# EAGLE board main (EAGLE 8.1.0)
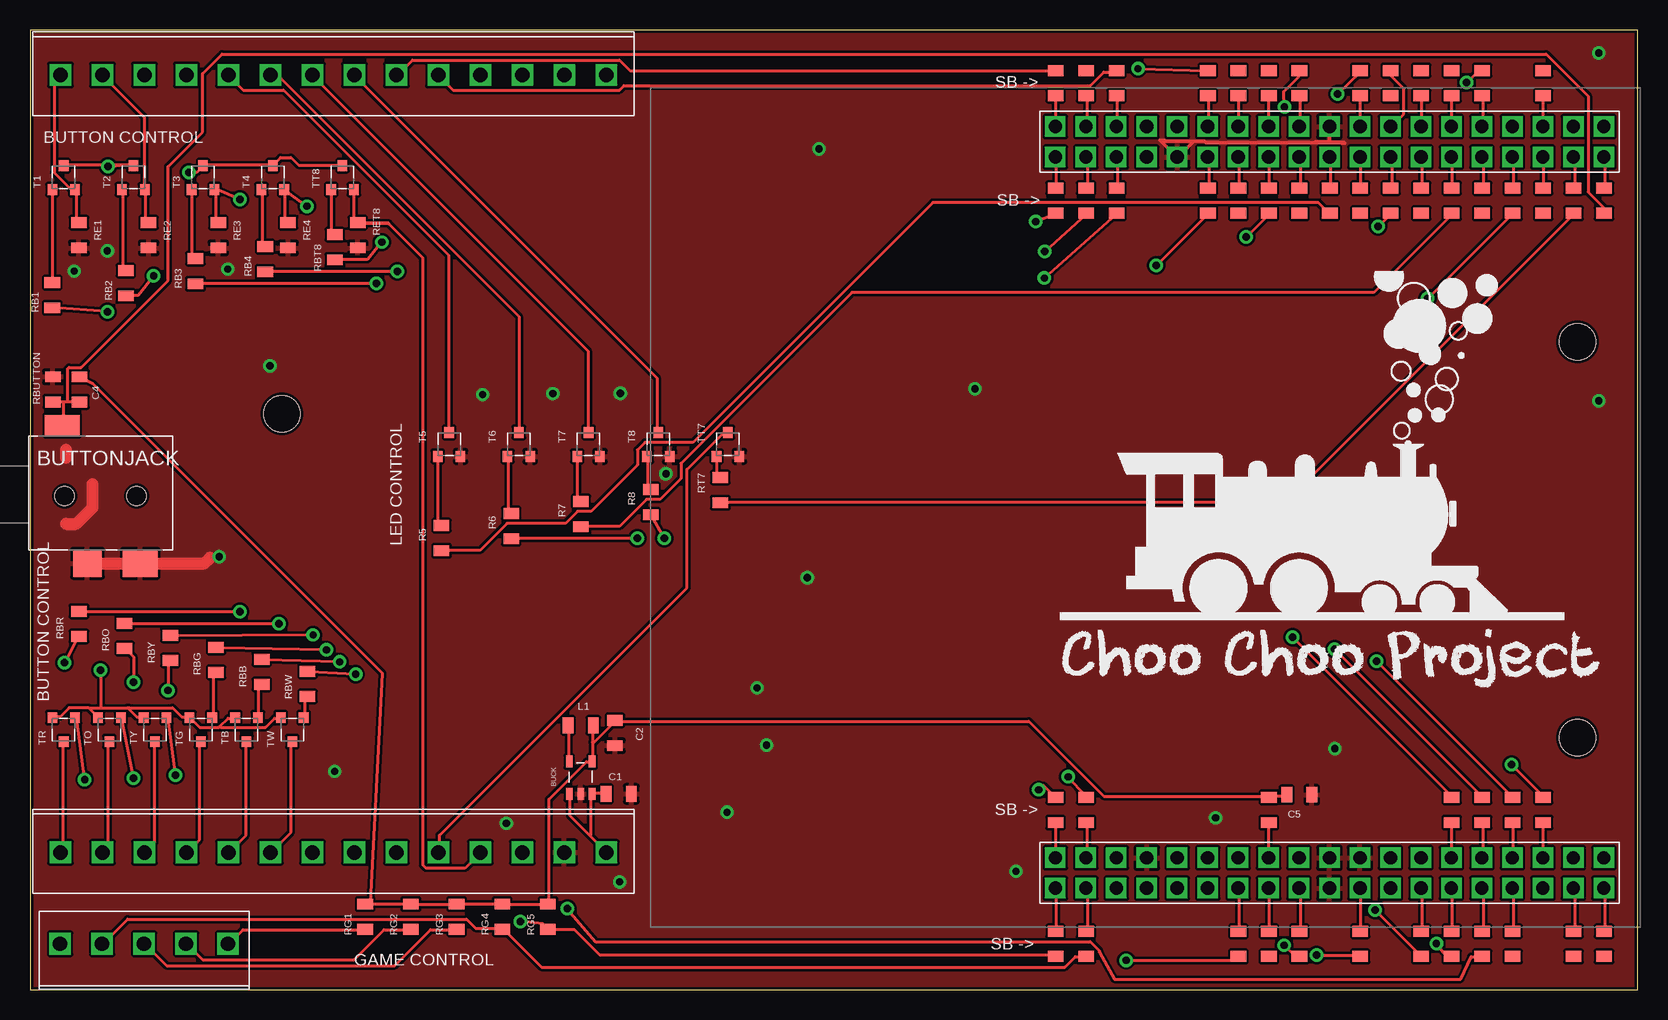
[diagram p0: board, top side]
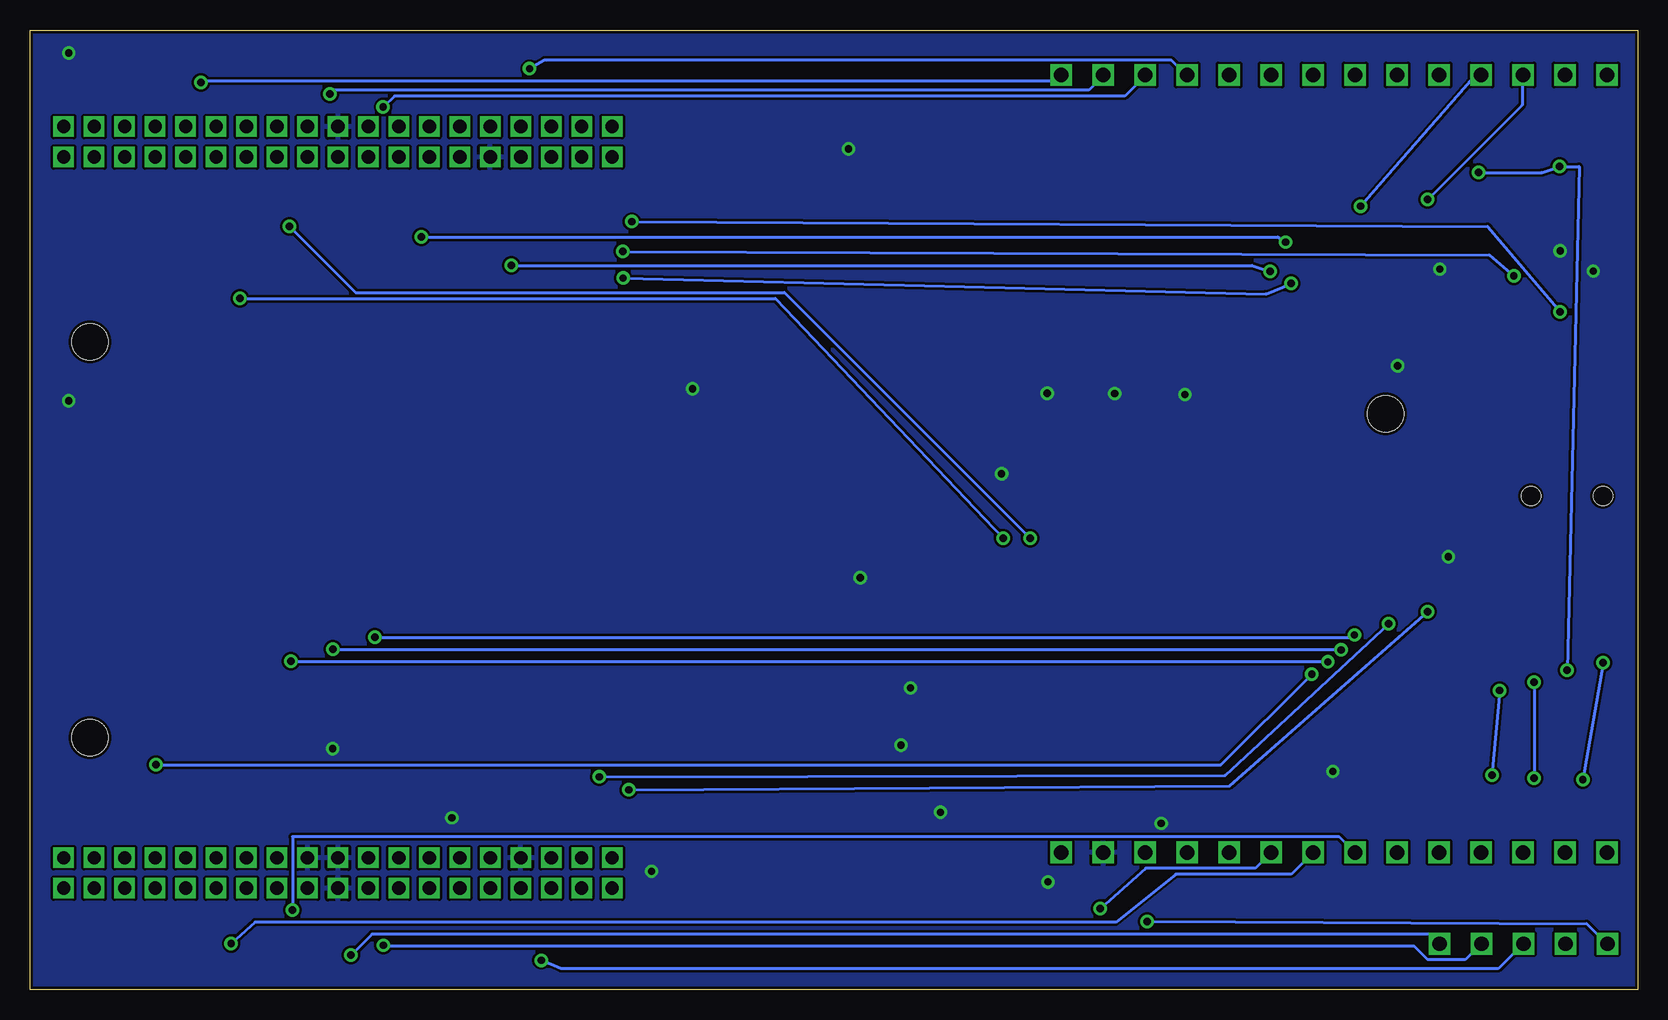
[diagram p1: board, bottom side, seen from below]

Size 134 x 80 mm. Coordinates in mm from the lower left corner, seen from the top.
Outline: 0,0 134,0 134,80 0,80 0,0
Copper layers (1*16): Top 0.035mm / dielectric 1.5mm / Bottom 0.035mm
Design rules "SparkFun *": minimum track width 8mil, minimum drill 0.3mm, track to track 8mil, track to pad 8mil, pad to pad 8mil, via to via 8mil, smd to smd 8mil, copper to edge 10mil, drill to drill 8mil, minimum pad ring 12mil, minimum via ring 10mil, stop-mask expansion 4mil, vias tented up to drill 25mil, thermal gap 10mil
Holes 3 mm at 21,48 129,54 129,21

## Footprints (pad centres in the part's own frame; a part is rotated, then mirrored left to right if it is on the bottom)
BUCK_DEV = smd 0.55 x 1: EN 1.9,0; FB 1.9,2.7; GND 0.95,0; SW 0,2.7; VIN 0,0
3.5MM_MONO_DEV = smd 2.9 x 1.75: P1 -6.2,5.875 | smd 2.9 x 2.25: P2 0.3,-5.625 | smd 2.4 x 2.25: P3 -4.1,-5.625 | hole 1.6: 0,0; -6,0
0805RES_DEV = smd 0.9 x 1.3: L -1.05,0; R 1.05,0
NUCLEO_SMALL_DEV = drill 1.1 square: P$1 0,45.72; P$2 0,43.18; P$3 0,40.64; P$4 0,38.1; P$5 0,35.56; P$6 0,33.02; P$7 0,30.48; P$8 0,27.94; P$9 0,25.4; P$10 0,22.86; P$11 0,20.32; P$12 0,17.78; P$13 0,15.24; P$14 0,12.7; P$15 0,10.16; P$16 0,7.62; P$17 0,5.08; P$18 0,2.54; P$19 0,0; P$20 2.54,45.72; P$21 2.54,43.18; P$22 2.54,40.64; P$23 2.54,38.1; P$24 2.54,35.56; P$25 2.54,33.02; P$26 2.54,30.48; P$27 2.54,27.94; P$28 2.54,25.4; P$29 2.54,22.86; P$30 2.54,20.32; P$31 2.54,17.78; P$32 2.54,15.24; P$33 2.54,12.7; P$34 2.54,10.16; P$35 2.54,7.62; P$36 2.54,5.08; P$37 2.54,2.54; P$38 2.54,0; P$39 60.96,45.72; P$40 60.96,43.18; P$41 60.96,40.64; P$42 60.96,38.1; P$43 60.96,35.56; P$44 60.96,33.02; P$45 60.96,30.48; P$46 60.96,27.94; P$47 60.96,25.4; P$48 60.96,22.86; P$49 60.96,20.32; P$50 60.96,17.78; P$51 60.96,15.24; P$52 60.96,12.7; P$53 60.96,10.16; P$54 60.96,7.62; P$55 60.96,5.08; P$56 60.96,2.54; P$57 60.96,0; P$58 63.5,45.72; P$59 63.5,43.18; P$60 63.5,40.64; P$61 63.5,38.1; P$62 63.5,35.56; P$63 63.5,33.02; P$64 63.5,30.48; P$65 63.5,27.94; P$66 63.5,25.4; P$67 63.5,22.86; P$68 63.5,20.32; P$69 63.5,17.78; P$70 63.5,15.24; P$71 63.5,12.7; P$72 63.5,10.16; P$73 63.5,7.62; P$74 63.5,5.08; P$75 63.5,2.54; P$76 63.5,0
MMBT2222A_DEV = smd 0.9 x 0.8: B -1,0.95; C 1,0; E -1,-0.95
5WIRE_DEV = drill 1.2 square: P$1 0,0; P$2 3.5,0; P$3 7,0; P$4 10.5,0; P$5 14,0
14WIRE_TERM_DEV = drill 1.2 square: P$1 0,0; P$2 3.5,0; P$3 7,0; P$4 10.5,0; P$5 14,0; P$6 17.5,0; P$7 21,0; P$8 24.5,0; P$9 28,0; P$10 31.5,0; P$11 35,0; P$12 38.5,0; P$13 42,0; P$14 45.5,0

## Placement (x,y rotation side)
BUCK  BUCK_DEV  [BUCK_DEV]  44.95,16.31 0 top
BUTTONJACK  3.5MM_MONO_DEV  [3.5MM_MONO_DEV]  8.89,41.15 0 top
C1  4.7uF  [0805RES_DEV]  49.08,16.31 180 top
C2  10uF  [0805RES_DEV]  48.76,21.39 90 top
C4  100nF  [0805RES_DEV]  1.91,50.04 270 top
C5  100nF  [0805RES_DEV]  105.81,16.24 180 top
L1  2.2uH  [0805RES_DEV]  45.9,22.02 0 top
NUCLEO-L476RG  NUCLEO_SMALL_DEV  [NUCLEO_SMALL_DEV]  131.19,8.45 90 top
R5  10k  [0805RES_DEV]  34.3,37.64 90 top
R6  10k  [0805RES_DEV]  40.12,38.64 90 top
R7  10k  [0805RES_DEV]  45.92,39.64 90 top
R8  10k  [0805RES_DEV]  51.73,40.64 90 top
RB1  10k  [0805RES_DEV]  1.86,57.88 270 top
RB2  10k  [0805RES_DEV]  7.99,58.88 270 top
RB3  10k  [0805RES_DEV]  13.79,59.88 270 top
RB4  10k  [0805RES_DEV]  19.61,60.88 270 top
RBB  10k  [0805RES_DEV]  19.32,26.48 90 top
RBG  19k  [0805RES_DEV]  15.51,27.48 90 top
RBO  10k  [0805RES_DEV]  7.89,29.48 90 top
RBR  10k  [0805RES_DEV]  4.08,30.48 90 top
RBT8  10k  [0805RES_DEV]  25.41,61.88 270 top
RBUTTON  10k  [0805RES_DEV]  4.13,50.04 90 top
RBW  10k  [0805RES_DEV]  23.13,25.48 90 top
RBY  10k  [0805RES_DEV]  11.7,28.48 90 top
RE1  4.7k  [0805RES_DEV]  4.08,62.88 270 top
RE2  4.7k  [0805RES_DEV]  9.89,62.88 270 top
RE3  4.7k  [0805RES_DEV]  15.7,62.88 270 top
RE4  4.7k  [0805RES_DEV]  21.51,62.88 270 top
RET8  4.7k  [0805RES_DEV]  27.32,62.88 270 top
RG1  10k  [0805RES_DEV]  27.94,6.08 270 top
RG2  10k  [0805RES_DEV]  31.75,6.08 270 top
RG3  10k  [0805RES_DEV]  35.56,6.08 270 top
RG4  10k  [0805RES_DEV]  39.37,6.08 270 top
RG5  10k  [0805RES_DEV]  43.18,6.08 270 top
RT7  10k  [0805RES_DEV]  57.55,41.64 90 top
SB1  0  [0805RES_DEV]  85.49,3.81 90 top
SB2  0  [0805RES_DEV]  88.03,3.81 90 top
SB3  0  [0805RES_DEV]  100.73,3.81 90 top
SB4  0  [0805RES_DEV]  103.27,3.81 90 top
SB5  0  [0805RES_DEV]  105.81,3.81 90 top
SB6  0  [0805RES_DEV]  110.89,3.81 90 top
SB7  0  [0805RES_DEV]  115.97,3.81 90 top
SB8  0  [0805RES_DEV]  118.51,3.81 90 top
SB9  0  [0805RES_DEV]  121.05,3.81 90 top
SB10  0  [0805RES_DEV]  123.59,3.81 90 top
SB11  0  [0805RES_DEV]  128.67,3.81 90 top
SB12  0  [0805RES_DEV]  131.21,3.81 90 top
SB13  0  [0805RES_DEV]  85.49,14.97 90 top
SB14  0  [0805RES_DEV]  88.03,14.97 90 top
SB15  0  [0805RES_DEV]  118.51,14.97 90 top
SB16  0  [0805RES_DEV]  121.05,14.97 90 top
SB17  0  [0805RES_DEV]  123.59,14.97 90 top
SB18  0  [0805RES_DEV]  126.13,14.97 90 top
SB19  0  [0805RES_DEV]  85.49,65.77 90 top
SB20  0  [0805RES_DEV]  88.03,65.77 90 top
SB21  0  [0805RES_DEV]  90.57,65.77 90 top
SB22  0  [0805RES_DEV]  98.19,65.77 90 top
SB23  0  [0805RES_DEV]  100.73,65.77 90 top
SB24  0  [0805RES_DEV]  103.27,65.77 90 top
SB25  0  [0805RES_DEV]  105.81,65.77 90 top
SB26  0  [0805RES_DEV]  108.35,65.77 90 top
SB27  0  [0805RES_DEV]  110.89,65.77 90 top
SB28  0  [0805RES_DEV]  113.43,65.77 90 top
SB29  0  [0805RES_DEV]  115.97,65.77 90 top
SB30  0  [0805RES_DEV]  118.51,65.77 90 top
SB31  0  [0805RES_DEV]  121.05,65.77 90 top
SB32  0  [0805RES_DEV]  123.59,65.77 90 top
SB33  0  [0805RES_DEV]  126.13,65.77 90 top
SB34  0  [0805RES_DEV]  128.67,65.77 90 top
SB35  0  [0805RES_DEV]  131.21,65.77 90 top
SB36  0  [0805RES_DEV]  85.49,75.56 90 top
SB37  0  [0805RES_DEV]  88.03,75.56 90 top
SB38  0  [0805RES_DEV]  90.57,75.56 90 top
SB39  0  [0805RES_DEV]  98.19,75.56 90 top
SB40  0  [0805RES_DEV]  100.73,75.56 90 top
SB41  0  [0805RES_DEV]  103.27,75.56 90 top
SB42  0  [0805RES_DEV]  105.81,75.56 90 top
SB43  0  [0805RES_DEV]  110.89,75.56 90 top
SB44  0  [0805RES_DEV]  113.43,75.56 270 top
SB45  0  [0805RES_DEV]  115.97,75.56 90 top
SB46  0  [0805RES_DEV]  118.51,75.56 90 top
SB47  0  [0805RES_DEV]  121.05,75.56 90 top
SB48  0  [0805RES_DEV]  126.13,75.56 90 top
SBPWR  0  [0805RES_DEV]  103.27,14.97 90 top
T1  MMBT2222L_DEV  [MMBT2222A_DEV]  2.81,67.69 90 top
T2  MMBT2222L_DEV  [MMBT2222A_DEV]  8.62,67.69 90 top
T3  MMBT2222L_DEV  [MMBT2222A_DEV]  14.43,67.69 90 top
T4  MMBT2222L_DEV  [MMBT2222A_DEV]  20.24,67.69 90 top
T5  MMBT2222L_DEV  [MMBT2222A_DEV]  34.94,45.45 90 top
T6  MMBT2222L_DEV  [MMBT2222A_DEV]  40.75,45.45 90 top
T7  MMBT2222L_DEV  [MMBT2222A_DEV]  46.56,45.45 90 top
T8  MMBT2222L_DEV  [MMBT2222A_DEV]  52.37,45.45 90 top
TB  MMBT2222L_DEV  [MMBT2222A_DEV]  18.05,21.67 270 top
TG  MMBT2222L_DEV  [MMBT2222A_DEV]  14.24,21.67 270 top
TO  MMBT2222L_DEV  [MMBT2222A_DEV]  6.62,21.67 270 top
TR  MMBT2222L_DEV  [MMBT2222A_DEV]  2.81,21.67 270 top
TT7  MMBT2222L_DEV  [MMBT2222A_DEV]  58.18,45.45 90 top
TT8  MMBT2222L_DEV  [MMBT2222A_DEV]  26.05,67.69 90 top
TW  MMBT2222L_DEV  [MMBT2222A_DEV]  21.86,21.67 270 top
TY  MMBT2222L_DEV  [MMBT2222A_DEV]  10.43,21.67 270 top
U$2  5WIRE_TERM_DEV  [5WIRE_DEV]  16.51,3.81 180 top
U$3  14WIRE_TERM_DEV  [14WIRE_TERM_DEV]  2.54,76.25 0 top
U$4  14WIRE_TERM_DEV  [14WIRE_TERM_DEV]  2.54,11.43 0 top

## Library data of the parts
BUCK BUTTONJACK C1 C2 C4 C5 L1 NUCLEO-L476RG R5-R8 RB1-RB4 RBB RBG RBO RBR RBT8 RBUTTON RBW RBY RE1-RE4 RET8 RG1-RG5 RT7 SB1-SB48 SBPWR T1-T8 TB TG TO TR TT7 TT8 TW TY U$2-U$4 = apple

## Nets
+3.3V: BUCK.FB C2.R C5.R L1.R RBUTTON.R RG1.L RG2.L RG3.L RG4.L RG5.L SBPWR.R
B2R1: RB1.L T1.B
B2R2: RB2.L T2.B
B2R3: RB3.L T3.B
B2R5: R5.R T5.B
B2R6: R6.R T6.B
B2R7: R7.R T7.B
B2R8: R8.R T8.B
B2RT7: RT7.R TT7.B
B2RT8: RBT8.L TT8.B
BTR3: RB4.L T4.B
C2N: T1.C T2.C T3.C T4.C TB.E TG.E TO.E TR.E TT8.C TW.E TY.E
GND: BUCK.GND BUTTONJACK.P2 BUTTONJACK.P3 C1.L C2.L C4.L C5.L NUCLEO-L476RG.P$10 NUCLEO-L476RG.P$23 NUCLEO-L476RG.P$29 NUCLEO-L476RG.P$30 NUCLEO-L476RG.P$43 NUCLEO-L476RG.P$67 RE1.R RE2.R RE3.R RE4.R RET8.R T5.E T6.E T7.E T8.E TT7.E U$4.P$13
GPIO1: RB1.R SB19.L
GPIO2: RB2.R SB20.L
GPIO3: RB3.R SB21.L
GPIO4: RB4.R SB22.L
GPIO5: R5.L SB26.L
GPIO6: R6.L SB28.L
GPIO7: R7.L SB30.L
GPIO8: R8.L SB32.L
GPIO9: SB36.R U$3.P$9
GPIO10: SB38.R U$3.P$10
GPIO11: SB39.R U$3.P$11
GPIO12: SB42.R U$3.P$12
GPIO13: SB43.R U$3.P$13
GPIO14: SB47.R U$3.P$14
GPIOB: RBB.R SB17.R
GPIOBUTTON: BUTTONJACK.P1 C4.R RBUTTON.L SB35.L
GPIOG: RBG.R SB16.R
GPIOG1: RG1.R SB6.L U$2.P$1
GPIOG2: RG2.R SB5.L U$2.P$2
GPIOG3: RG3.R SB3.L U$2.P$3
GPIOG4: RG4.R SB2.L U$2.P$4
GPIOG5: RG5.R SB1.L U$2.P$5
GPIOO: RBO.R SB14.R
GPIOR: RBR.R SB13.R
GPIOT1: SB7.L U$4.P$7
GPIOT2: SB8.L U$4.P$8
GPIOT3: SB9.L U$4.P$9
GPIOT7: RT7.L SB34.L
GPIOT8: RBT8.R SB24.L
GPIOW: RBW.R SB18.R
GPIOY: RBY.R SB15.R
N$6: RBR.L TR.B
N$8: NUCLEO-L476RG.P$1 SB1.R
N$9: RBO.L TO.B
N$10: NUCLEO-L476RG.P$2 SB2.R
N$11: RBY.L TY.B
N$13: RBG.L TG.B
N$15: RBB.L TB.B
N$17: RBW.L TW.B
N$18: NUCLEO-L476RG.P$7 SB3.R
N$20: NUCLEO-L476RG.P$8 SB4.R
N$22: NUCLEO-L476RG.P$9 SB5.R
N$23: NUCLEO-L476RG.P$13 SB7.R
N$24: NUCLEO-L476RG.P$14 SB8.R
N$25: NUCLEO-L476RG.P$15 SB9.R
N$26: NUCLEO-L476RG.P$16 SB10.R
N$27: NUCLEO-L476RG.P$18 SB11.R
N$28: NUCLEO-L476RG.P$19 SB12.R
N$29: NUCLEO-L476RG.P$36 SB18.L
N$30: NUCLEO-L476RG.P$35 SB17.L
N$31: NUCLEO-L476RG.P$34 SB16.L
N$32: NUCLEO-L476RG.P$33 SB15.L
N$33: NUCLEO-L476RG.P$21 SB14.L
N$34: NUCLEO-L476RG.P$20 SB13.L
N$35: NUCLEO-L476RG.P$39 SB19.R
N$36: NUCLEO-L476RG.P$40 SB20.R
N$37: NUCLEO-L476RG.P$41 SB21.R
N$38: NUCLEO-L476RG.P$44 SB22.R
N$39: NUCLEO-L476RG.P$45 SB23.R
N$40: NUCLEO-L476RG.P$46 SB24.R
N$41: NUCLEO-L476RG.P$47 SB25.R
N$42: NUCLEO-L476RG.P$48 SB26.R
N$43: NUCLEO-L476RG.P$49 SB27.R
N$44: NUCLEO-L476RG.P$11 SB6.R
N$45: NUCLEO-L476RG.P$50 SB28.R
N$46: NUCLEO-L476RG.P$51 SB29.R
N$47: NUCLEO-L476RG.P$52 SB30.R
N$48: NUCLEO-L476RG.P$53 SB31.R
N$49: NUCLEO-L476RG.P$54 SB32.R
N$50: NUCLEO-L476RG.P$55 SB33.R
N$51: NUCLEO-L476RG.P$56 SB34.R
N$52: NUCLEO-L476RG.P$57 SB35.R
N$53: NUCLEO-L476RG.P$58 SB36.L
N$54: NUCLEO-L476RG.P$59 SB37.L
N$55: NUCLEO-L476RG.P$60 SB38.L
N$56: NUCLEO-L476RG.P$68 SB43.L
N$57: NUCLEO-L476RG.P$69 SB44.L
N$58: NUCLEO-L476RG.P$63 SB39.L
N$59: NUCLEO-L476RG.P$64 SB40.L
N$60: NUCLEO-L476RG.P$65 SB41.L
N$61: NUCLEO-L476RG.P$66 SB42.L
N$62: NUCLEO-L476RG.P$70 SB45.L
N$63: NUCLEO-L476RG.P$71 SB46.L
N$64: NUCLEO-L476RG.P$72 SB47.L
N$65: NUCLEO-L476RG.P$74 SB48.L
N$66: NUCLEO-L476RG.P$27 SBPWR.L
P1: RE1.L T1.E U$3.P$1
P2: RE2.L T2.E U$3.P$2
P3: RE3.L T3.E U$3.P$3
P4: RE4.L T4.E U$3.P$4
P5: T5.C U$3.P$5
P6: T6.C U$3.P$6
P7: T7.C U$3.P$7
P8: T8.C U$3.P$8
PB: TB.C U$4.P$5
PG: TG.C U$4.P$4
PGAME: U$4.P$12
PO: TO.C U$4.P$2
PR: TR.C U$4.P$1
PT7: TT7.C U$4.P$10
PT8: RET8.L TT8.E U$4.P$11
PW: TW.C U$4.P$6
PY: TY.C U$4.P$3
SW2L1: BUCK.SW L1.L
VCC: BUCK.EN BUCK.VIN C1.R U$4.P$14

## Tracks (layer width: path | path; a pad name or v marks a point on that pad's centre or on a via)
+3.3V
  Top 0.254: C5.R 104.75,16.12 103.38,16.12 SBPWR.R 103.25,16.12 89.5,16.12 83.25,22.38 48.88,22.38 C2.R 48.75,22.38 47,20.62 46.88,20.62 | 46.88,20.62 46.88,22 L1.R | 46.88,20.62 46.88,19.12 BUCK.FB 46.75,19 46.38,19 43.25,15.88 43.25,7.25 RG5.L 43.12,7.12 RG4.L 39.25,7.12 35.62,7.12 RG3.L 35.5,7.12 31.88,7.12 RG2.L 28,7.12 RG1.L 28.38,7.25 29.38,26.38 5.25,50.5 4.25,51 RBUTTON.R
B2R1
  Top 0.254: T1.B 1.88,66.62 1.88,59 RB1.L
B2R2
  Top 0.254: T2.B 7.75,66.62 7.75,60.12 7.88,60 RB2.L
B2R3
  Top 0.254: T3.B 13.5,66.62 13.5,61.25 13.75,61 RB3.L
B2R5
  Top 0.254: T5.B 34,44.38 34,39 34.25,38.75 R5.R
B2R6
  Top 0.254: T6.B 39.88,44.38 39.88,39.88 40,39.75 R6.R
B2R7
  Top 0.254: T7.B 45.62,44.38 45.62,41 45.88,40.75 R7.R
B2R8
  Top 0.254: T8.B 51.5,44.38 51.5,41.88 51.62,41.75 R8.R
B2RT7
  Top 0.254: TT7.B 57.25,44.38 57.25,43 57.5,42.75 RT7.R
B2RT8
  Top 0.254: TT8.B 25.12,66.62 25.12,63.25 25.38,63 RBT8.L
BTR3
  Top 0.254: T4.B 19.38,66.62 19.38,62.12 19.5,62 RB4.L
C2N  (via drill 0.61)
  Top 0.254: 4.88,23.5 3.25,23.5 2.5,22.75 1.88,22.75 TR.E | 4.88,23.5 5.62,22.75 TO.E | 8.19,23.44 8.12,23.5 5.88,23.5 | 8.19,23.44 8.88,22.75 9.38,22.75 TY.E | 4.88,23.5 5.88,23.5 | 8.19,23.44 8.25,23.5 11.88,23.5 12.62,22.75 13.25,22.75 TG.E 13.38,22.62 14.12,21.88 15.75,21.88 15.81,21.94 | 15.81,21.94 16.5,22.62 17,22.62 TB.E | TW.E 20.88,22.62 20.38,22.62 19.62,21.88 15.88,21.88 15.81,21.94 | 7.5,68.75 8.5,68.75 T2.C | 7.5,68.75 2.88,68.75 T1.C | TT8.C 26,68.75 22.38,68.75 21.75,69.38 20.88,69.38 20.25,68.75 T4.C 20.12,68.75 14.5,68.75 T3.C 14.38,68.62 13.88,68.12 v13.25,68.12 | v6.5,68.62 7.5,68.75 | v5.88,26.62 5.88,23.5
  Bottom 0.254: v13.25,68.12 8,68.12 v6.5,68.62 4.88,68.62 v5.88,26.62
GND  (via drill 0.6)
  Top 0.305: NUCLEO-L476RG.P$67 108.33,70.82 108.21,70.7 107.16,70.7 107.1,70.64 109.53,70.64 109.59,70.58 109.37,70.58 109.33,70.62 98,70.62 97.88,70.74 97,70.74 | 97,70.74 95.67,69.41 NUCLEO-L476RG.P$43 95.59,69.41 94.18,70.82 94.54,70.82 94.63,70.74 97,70.74
  Top 1.016: BUTTONJACK.P3 14.53,35.52 15,36 | 3,38.83 3.85,38.83 5.21,40.19 5.21,42.11 | 3,44.33 3,45
  other vias: 20,52 3.69,59.89 6.45,61.58 16.48,60.06 37.73,49.6 43.58,49.68 49.21,49.7 53.01,43 39.71,13.86 49.14,8.97 58.11,14.78 61.39,20.38 60.61,25.14 64.79,34.33 98.84,14.31 82.19,9.85 108.77,20.08 130.77,78.08 65.77,70.08 78.77,50.08 130.77,49.08 15.77,36.08 25.39,18.18
  pour Top: 0,0 0,80.01 134.02,80.01 134.02,0
  pour Bottom: -3,-3 -3,84 135,84 135,-3
GPIO1  (via drill 0.61)
  Top 0.254: v6.45,56.51 1.88,56.88 RB1.R | v83.83,64.03 85.38,64.62 SB19.L
  Bottom 0.254: v6.45,56.51 12.5,63.62 v83.83,64.03
GPIO2  (via drill 0.61)
  Top 0.254: v10.31,59.5 9,57.88 8,57.88 RB2.R | v84.58,61.53 88,64.62 SB20.L
  Bottom 0.254: v10.31,59.5 12.38,61.25 v84.58,61.53
GPIO3  (via drill 0.61)
  Top 0.254: v28.88,58.88 13.88,58.88 RB3.R | v84.56,59.32 90.5,64.62 SB21.L
  Bottom 0.254: v28.88,58.88 31,58 v84.56,59.32
GPIO4  (via drill 0.61)
  Top 0.254: v30.62,59.88 19.62,59.88 RB4.R | v93.88,60.38 98.12,64.62 SB22.L
  Bottom 0.254: v30.62,59.88 32.12,60.38 v93.88,60.38
GPIO5
  Top 0.254: R5.L 34.38,36.62 37.5,36.62 39.75,38.88 44.62,38.88 45.62,39.88 46.75,39.88 50.62,43.75 50.62,45 51.25,45.62 55.25,45.62 75.25,65.62 107.38,65.62 108.25,64.75 SB26.L
GPIO6  (via drill 0.61)
  Top 0.254: v50.62,37.62 40.12,37.62 R6.L | v112.38,63.62 113.38,64.62 SB28.L
  Bottom 0.254: v50.62,37.62 71.12,58.12 106.88,58.12 v112.38,63.62
GPIO7
  Top 0.254: R7.L 46,38.62 49.12,38.62 51.38,40.88 52.5,40.88 54.25,42.62 54.25,43.88 68.5,58.12 112,58.12 118.5,64.62 SB30.L
GPIO8  (via drill 0.61)
  Top 0.254: v52.88,37.62 51.75,39.62 R8.L | v116.5,57.62 123.5,64.62 SB32.L
  Bottom 0.254: v52.88,37.62 71.88,57.62 v116.5,57.62
GPIO9
  Top 0.254: SB36.R 85.38,76.62 50,76.62 49.12,77.5 31.88,77.5 30.62,76.25 U$3.P$9
GPIO10
  Top 0.254: SB38.R 90.5,76.5 89.5,76.5 88.38,75.38 49.5,75.38 49.12,75 35.25,75 34.12,76.12 U$3.P$10
GPIO11  (via drill 0.61)
  Top 0.254: v92.36,76.78 98.12,76.62 SB39.R
  Bottom 0.254: v92.36,76.78 91.12,77.5 38.88,77.5 37.62,76.25 U$3.P$11
GPIO12  (via drill 0.61)
  Top 0.254: v104.57,73.58 104.5,74.88 105.75,76.12 105.75,76.5 SB42.R
  Bottom 0.254: v104.57,73.58 103.62,74.5 42.75,74.5 41.12,76.12 U$3.P$12
GPIO13  (via drill 0.61)
  Top 0.254: v109,74.67 110.88,76.5 SB43.R
  Bottom 0.254: v109,74.67 109.12,75 45.75,75 44.62,76.12 U$3.P$13
GPIO14  (via drill 0.61)
  Top 0.254: v119.75,75.62 120.62,76.5 121,76.5 SB47.R
  Bottom 0.254: v119.75,75.62 119.62,75.75 48.5,75.75 48.12,76.12 U$3.P$14
GPIOB  (via drill 0.61)
  Top 0.254: v25.81,27.32 19.38,27.5 RBB.R | v112.25,27.38 123.5,16.12 SB17.R
  Bottom 0.254: v25.81,27.32 26.12,27.38 v112.25,27.38
GPIOBUTTON
  Top 0.254: 3.12,49 RBUTTON.L | 3.12,49 2.75,49 | 2.75,49 2,49 C4.R | 3.12,49 3.12,51.75 3.25,51.88 4.25,51.88 11.5,59.12 11.5,68.62 14.38,71.5 14.38,76.38 16,78 126.38,78 129.88,74.5 129.88,66.5 131.12,65.25 131.12,64.75 SB35.L | 2.75,49 2.75,47.12 BUTTONJACK.P1
GPIOG  (via drill 0.61)
  Top 0.254: v24.72,28.32 15.62,28.5 RBG.R | v108.75,28.38 121,16.12 SB16.R
  Bottom 0.254: v24.72,28.32 25.12,28.38 v108.75,28.38
GPIOG1  (via drill 0.61)
  Top 0.254: RG1.R 27.88,5 17.75,5 16.62,3.88 U$2.P$1 | v107.25,2.88 110.88,2.88 SB6.L
  Bottom 0.254: v107.25,2.88 105.5,4.62 17.38,4.62 16.62,3.88 U$2.P$1
GPIOG2  (via drill 0.61)
  Top 0.254: RG2.R 31.75,5 29.5,5 27,2.5 14.38,2.5 13.12,3.75 U$2.P$2 | v104.54,3.69 105.38,2.88 105.75,2.88 SB5.L
  Bottom 0.254: v104.54,3.69 104.38,3.62 18.62,3.62 17.5,2.5 14.38,2.5 13.12,3.75 U$2.P$2
GPIOG3  (via drill 0.61)
  Top 0.254: RG3.R 35.5,5 33.38,5 30.38,2 11.38,2 9.62,3.75 U$2.P$3 | v91.39,2.43 100.62,2.43 SB3.L
  Bottom 0.254: v91.39,2.43 89.75,1.75 11.62,1.75 9.62,3.75 U$2.P$3
GPIOG4
  Top 0.254: U$2.P$4 6.12,3.88 8.12,5.88 36.38,5.88 37.12,5.12 39.25,5.12 RG4.R 39.5,5 42.62,1.88 86.25,1.88 87.12,2.75 88,2.75 SB2.L
GPIOG5  (via drill 0.61)
  Top 0.254: SB1.L 85.38,2.88 47.5,2.88 45.38,5 43.25,5 RG5.R 43.12,5.12 42.75,5.5 v40.88,5.67
  Bottom 0.254: v40.88,5.67 4.25,5.5 2.62,3.88 U$2.P$5
GPIOO  (via drill 0.61)
  Top 0.254: v20.75,30.5 8,30.5 RBO.R | v86.54,17.73 88,16.12 SB14.R
  Bottom 0.254: v20.75,30.5 34.38,17.88 v86.54,17.73
GPIOR  (via drill 0.61)
  Top 0.254: v17.5,31.5 4.12,31.5 RBR.R | v84.08,16.65 84.5,17 85.38,16.12 SB13.R
  Bottom 0.254: v17.5,31.5 34,17 v84.08,16.65
GPIOT1  (via drill 0.61)
  Top 0.254: v112.12,6.62 115.88,2.88 SB7.L
  Bottom 0.254: v112.12,6.62 112.12,12.75 24.88,12.75 23.62,11.5 U$4.P$7
GPIOT2  (via drill 0.61)
  Top 0.254: v117.23,3.83 118,2.88 118.5,2.88 SB8.L
  Bottom 0.254: v117.23,3.83 115.25,5.62 43.5,5.62 38.5,9.62 28.88,9.62 27.12,11.38 U$4.P$8
GPIOT3  (via drill 0.61)
  Top 0.254: v44.78,6.74 47.12,4 88.38,4 89.12,3.25 89.12,3.12 90.38,0.88 119.25,0.88 120.12,2.75 121,2.75 SB9.L
  Bottom 0.254: v44.78,6.74 41,10.12 31.88,10.12 30.62,11.38 U$4.P$9
GPIOT7
  Top 0.254: RT7.L 57.62,40.62 104.62,40.62 128.62,64.62 SB34.L
GPIOT8  (via drill 0.61)
  Top 0.254: v29.32,62.31 28.12,60.88 25.5,60.88 RBT8.R | v101.38,62.75 103.25,64.62 SB24.L
  Bottom 0.254: v29.32,62.31 30,62.75 v101.38,62.75
GPIOW  (via drill 0.61)
  Top 0.254: v27.15,26.29 23.25,26.5 RBW.R | v123.5,18.75 126.12,16.12 SB18.R
  Bottom 0.254: v27.15,26.29 34.75,18.75 v123.5,18.75
GPIOY  (via drill 0.61)
  Top 0.254: v23.6,29.56 11.75,29.5 RBY.R | v105.25,29.38 118.5,16.12 SB15.R
  Bottom 0.254: v23.6,29.56 24.12,29.38 v105.25,29.38
N$6  (via drill 0.61)
  Top 0.254: v4.56,17.5 3.88,22.62 TR.B | v2.88,27.25 3.88,29.25 4,29.38 RBR.L
  Bottom 0.254: v2.88,27.25 v4.56,17.5
N$8
  Top 0.254: SB1.R 85.5,4.88 85.5,8.38 NUCLEO-L476RG.P$1
N$9  (via drill 0.61)
  Top 0.254: v8.62,17.62 7.62,22.62 TO.B | v8.62,25.61 8.62,27.75 8,28.38 RBO.L
  Bottom 0.254: v8.62,25.61 v8.62,17.62
N$10
  Top 0.254: SB2.R 88.12,4.88 88.12,8.38 NUCLEO-L476RG.P$2
N$11  (via drill 0.61)
  Top 0.254: v12.13,17.86 11.5,22.62 TY.B | v11.5,24.93 11.5,27.25 11.62,27.38 RBY.L
  Bottom 0.254: v11.5,24.93 v12.13,17.86
N$13
  Top 0.254: TG.B 15.25,22.75 15.25,26.12 15.5,26.38 RBG.L
N$15
  Top 0.254: TB.B 19,25.12 19.25,25.38 RBB.L
N$17
  Top 0.254: TW.B 22.88,22.75 22.88,24.12 23.12,24.38 RBW.L
N$18
  Top 0.254: SB3.R 100.75,4.88 100.75,8.38 NUCLEO-L476RG.P$7
N$20
  Top 0.254: NUCLEO-L476RG.P$8 103.25,4.88 SB4.R
N$22
  Top 0.254: SB5.R 105.88,4.88 105.88,8.38 NUCLEO-L476RG.P$9
N$23
  Top 0.254: SB7.R 116,4.88 116,8.38 NUCLEO-L476RG.P$13
N$24
  Top 0.254: SB8.R 118.5,4.88 118.5,8.38 NUCLEO-L476RG.P$14
N$25
  Top 0.254: SB9.R 121.12,4.88 121.12,8.38 NUCLEO-L476RG.P$15
N$26
  Top 0.254: SB10.R 123.62,4.88 123.62,8.38 NUCLEO-L476RG.P$16
N$27
  Top 0.254: SB11.R 128.75,4.88 128.75,8.38 NUCLEO-L476RG.P$18
N$28
  Top 0.254: SB12.R 131.25,4.88 131.25,8.38 NUCLEO-L476RG.P$19
N$29
  Top 0.254: SB18.L 126.12,13.88 126.12,11 NUCLEO-L476RG.P$36
N$30
  Top 0.254: SB17.L 123.62,13.88 123.62,11 NUCLEO-L476RG.P$35
N$31
  Top 0.254: SB16.L 121.12,13.88 121.12,11 NUCLEO-L476RG.P$34
N$32
  Top 0.254: SB15.L 118.5,13.88 NUCLEO-L476RG.P$33
N$33
  Top 0.254: SB14.L 88.12,13.88 88.12,11 NUCLEO-L476RG.P$21
N$34
  Top 0.254: SB13.L 85.5,13.88 85.5,11 NUCLEO-L476RG.P$20
N$35
  Top 0.254: SB19.R 85.5,66.88 85.5,69.38 NUCLEO-L476RG.P$39
N$36
  Top 0.254: SB20.R 88.12,66.88 88.12,69.38 NUCLEO-L476RG.P$40
N$37
  Top 0.254: SB21.R 90.62,66.88 90.62,69.38 NUCLEO-L476RG.P$41
N$38
  Top 0.254: SB22.R 98.25,66.88 98.25,69.38 NUCLEO-L476RG.P$44
N$39
  Top 0.254: SB23.R 100.75,66.88 100.75,69.38 NUCLEO-L476RG.P$45
N$40
  Top 0.254: NUCLEO-L476RG.P$46 103.25,66.88 SB24.R
N$41
  Top 0.254: SB25.R 105.88,66.88 105.88,69.38 NUCLEO-L476RG.P$47
N$42
  Top 0.254: SB26.R 108.38,66.88 108.38,69.38 NUCLEO-L476RG.P$48
N$43
  Top 0.254: SB27.R 110.88,66.88 110.88,69.38 NUCLEO-L476RG.P$49
N$44
  Top 0.254: SB6.R 110.88,4.88 110.88,8.38 NUCLEO-L476RG.P$11
N$45
  Top 0.254: SB28.R 113.5,66.88 113.5,69.38 NUCLEO-L476RG.P$50
N$46
  Top 0.254: SB29.R 116,66.88 116,69.38 NUCLEO-L476RG.P$51
N$47
  Top 0.254: SB30.R 118.5,66.88 118.5,69.38 NUCLEO-L476RG.P$52
N$48
  Top 0.254: SB31.R 121.12,66.88 121.12,69.38 NUCLEO-L476RG.P$53
N$49
  Top 0.254: SB32.R 123.62,66.88 123.62,69.38 NUCLEO-L476RG.P$54
N$50
  Top 0.254: SB33.R 126.12,66.88 126.12,69.38 NUCLEO-L476RG.P$55
N$51
  Top 0.254: SB34.R 128.75,66.88 128.75,69.38 NUCLEO-L476RG.P$56
N$52
  Top 0.254: SB35.R 131.25,66.88 131.25,69.38 NUCLEO-L476RG.P$57
N$53
  Top 0.254: SB36.L 85.5,74.5 85.5,72 NUCLEO-L476RG.P$58
N$54
  Top 0.254: SB37.L 88.12,74.5 88.12,72 NUCLEO-L476RG.P$59
N$55
  Top 0.254: SB38.L 90.62,74.5 90.62,72 NUCLEO-L476RG.P$60
N$56
  Top 0.254: SB43.L 110.88,74.5 110.88,72 NUCLEO-L476RG.P$68
N$57
  Top 0.254: SB44.L 113.5,76.5 113.5,76.12 114.5,75.12 114.5,73 113.5,72 NUCLEO-L476RG.P$69
N$58
  Top 0.254: SB39.L 98.25,74.5 98.25,72 NUCLEO-L476RG.P$63
N$59
  Top 0.254: SB40.L 100.75,74.5 100.75,72 NUCLEO-L476RG.P$64
N$60
  Top 0.254: NUCLEO-L476RG.P$65 103.25,74.5 SB41.L
N$61
  Top 0.254: SB42.L 105.88,74.5 105.88,72 NUCLEO-L476RG.P$66
N$62
  Top 0.254: SB45.L 116,74.5 116,72 NUCLEO-L476RG.P$70
N$63
  Top 0.254: SB46.L 118.5,74.5 118.5,72 NUCLEO-L476RG.P$71
N$64
  Top 0.254: SB47.L 121.12,74.5 121.12,72 NUCLEO-L476RG.P$72
N$65
  Top 0.254: SB48.L 126.12,74.5 126.12,72 NUCLEO-L476RG.P$74
N$66
  Top 0.254: NUCLEO-L476RG.P$27 103.25,13.88 SBPWR.L
P1
  Top 0.254: RE1.L 4,64 3.88,64.12 3.88,66.62 T1.E 3.75,66.75 3.38,66.75 2,68.12 2,75.62 2.5,76.12 U$3.P$1
P2
  Top 0.254: RE2.L 9.88,64 9.62,64.25 9.62,66.62 T2.E 9.5,66.75 9.5,72.75 6.12,76.12 U$3.P$2
P3  (via drill 0.61)
  Top 0.254: RE3.L 15.62,64 15.5,64.12 15.5,66.62 T3.E 15.5,66.75 v17.5,65.88
  Bottom 0.254: v17.5,65.88 9.62,73.75 9.62,76.12 U$3.P$3
P4  (via drill 0.61)
  Top 0.254: RE4.L 21.5,64 21.25,64.25 21.25,66.62 T4.E v23.08,65.31
  Bottom 0.254: v23.08,65.31 13.62,76.12 13.12,76.12 U$3.P$4
P5
  Top 0.254: T5.C 34.88,46.5 34.88,61.25 21.12,75 17.75,75 16.62,76.12 U$3.P$5
P6
  Top 0.254: T6.C 40.75,56.12 20.75,76.12 20.12,76.12 U$3.P$6
P7
  Top 0.254: T7.C 46.5,46.5 46.5,53.25 23.62,76.12 U$3.P$7
P8
  Top 0.254: T8.C 52.25,46.5 52.25,51 27.12,76.12 U$3.P$8
PB
  Top 0.254: TB.C 18,20.62 18,12.88 16.62,11.5 U$4.P$5
PG
  Top 0.254: TG.C 14.12,20.62 14.12,12.5 13.12,11.5 U$4.P$4
PO
  Top 0.254: TO.C 6.5,20.62 6.5,11.88 6.12,11.5 U$4.P$2
PR
  Top 0.254: TR.C 2.75,20.62 2.75,11.62 2.62,11.5 U$4.P$1
PT7
  Top 0.254: TT7.C 58.12,46.38 57.75,46.38 54.75,43.38 54.75,33.5 34.12,12.88 34.12,11.5 U$4.P$10
PT8
  Top 0.254: TT8.E 27,64.25 RET8.L 28,63.9 28.38,63.88 | 29.88,63.88 32.75,61 32.75,10.38 33,10.12 36.25,10.12 37.5,11.38 U$4.P$11
  Top 0.305: 28,63.9 29.86,63.9 29.88,63.88
PW
  Top 0.254: TW.C 21.75,20.62 21.75,13.12 20.12,11.5 U$4.P$6
PY
  Top 0.254: TY.C 10.38,20.62 10.38,12.25 9.62,11.5 U$4.P$3
SW2L1
  Top 0.254: BUCK.SW 44.88,19.12 44.88,22 L1.L
VCC
  Top 0.254: C1.R 48,16.38 46.88,16.38 BUCK.EN 46.75,16.25 46.75,12.88 46.69,12.81 | 46.69,12.81 48,11.5 U$4.P$14 | 46.69,12.81 45,14.5 45,16.25 BUCK.VIN

## Text on the board
tPlace: SB -> | BUTTON CONTROL | SB -> | LED CONTROL | BUTTON CONTROL | SB -> | SB -> | GAME CONTROL | C:/Users/Christian Krueger/Documents/eagle/Apple/silkscreen/trainmonologo.bmp